# EAGLE board OpenLog_Panel_v14 (EAGLE 7.3.0), part 1 of 7
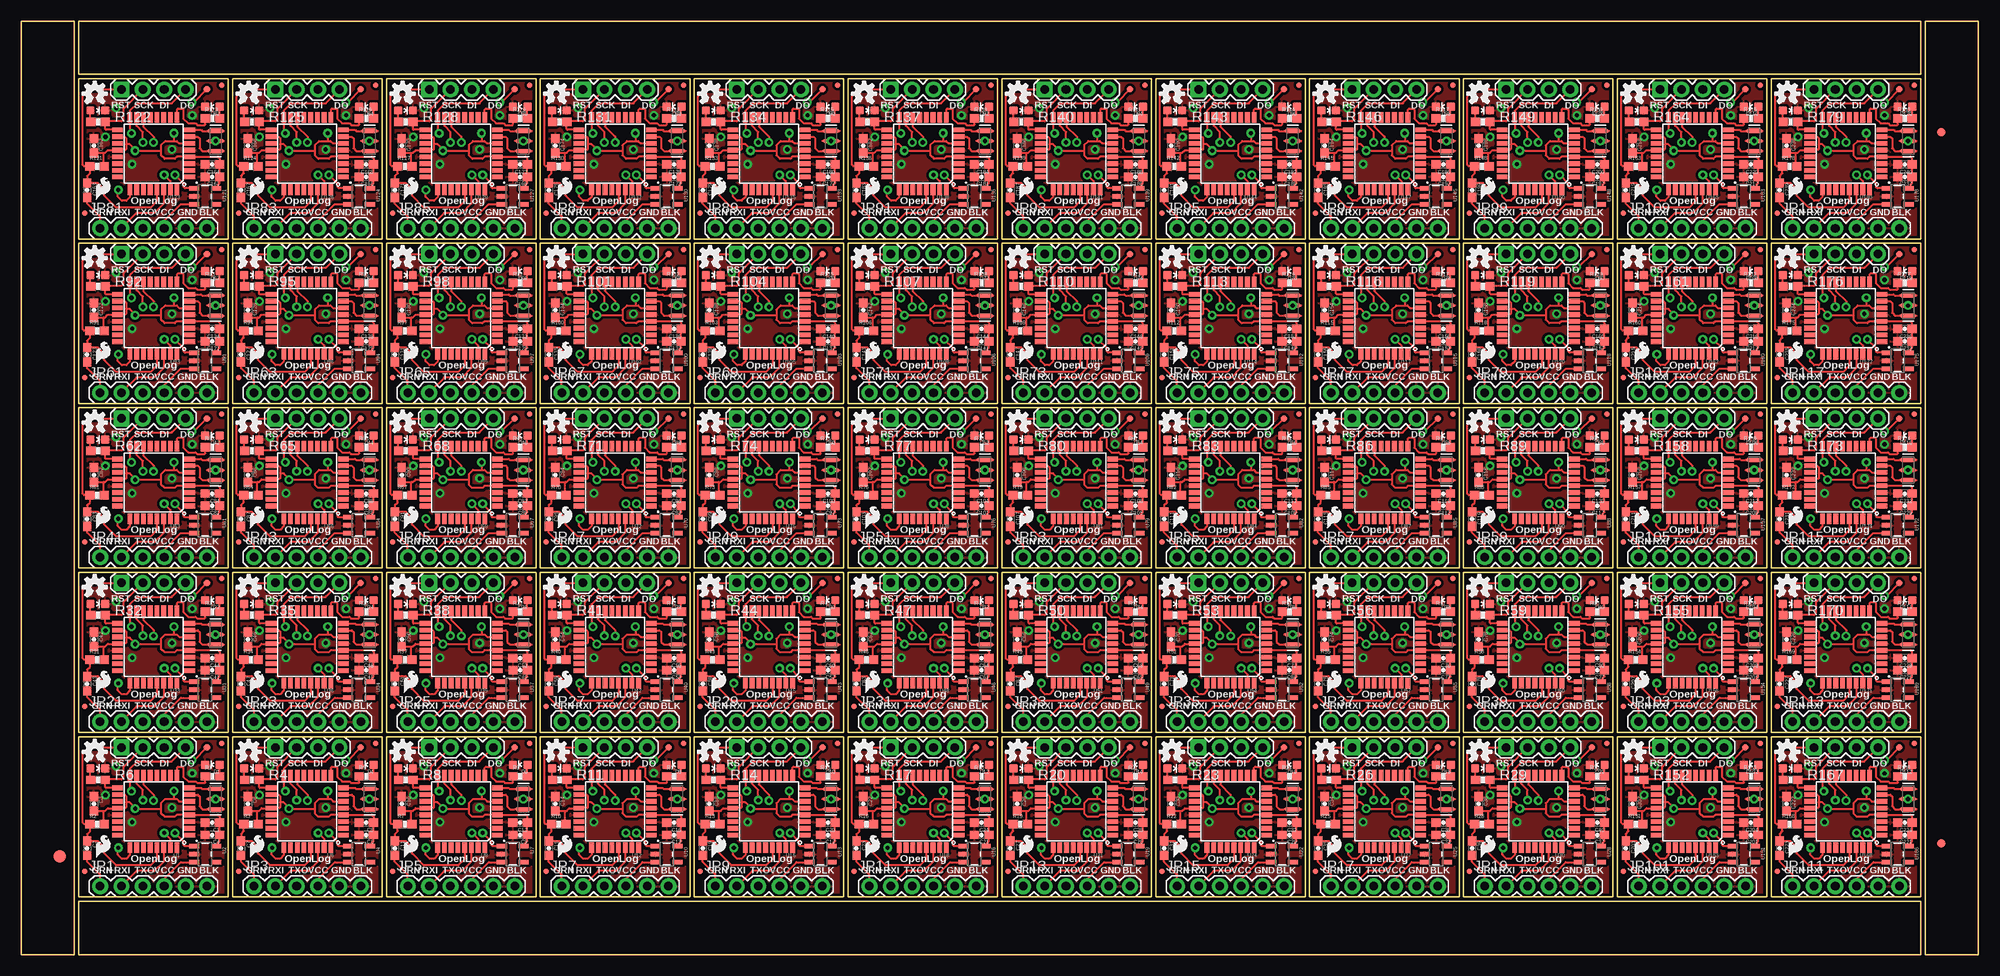
[diagram p0: board, top side]
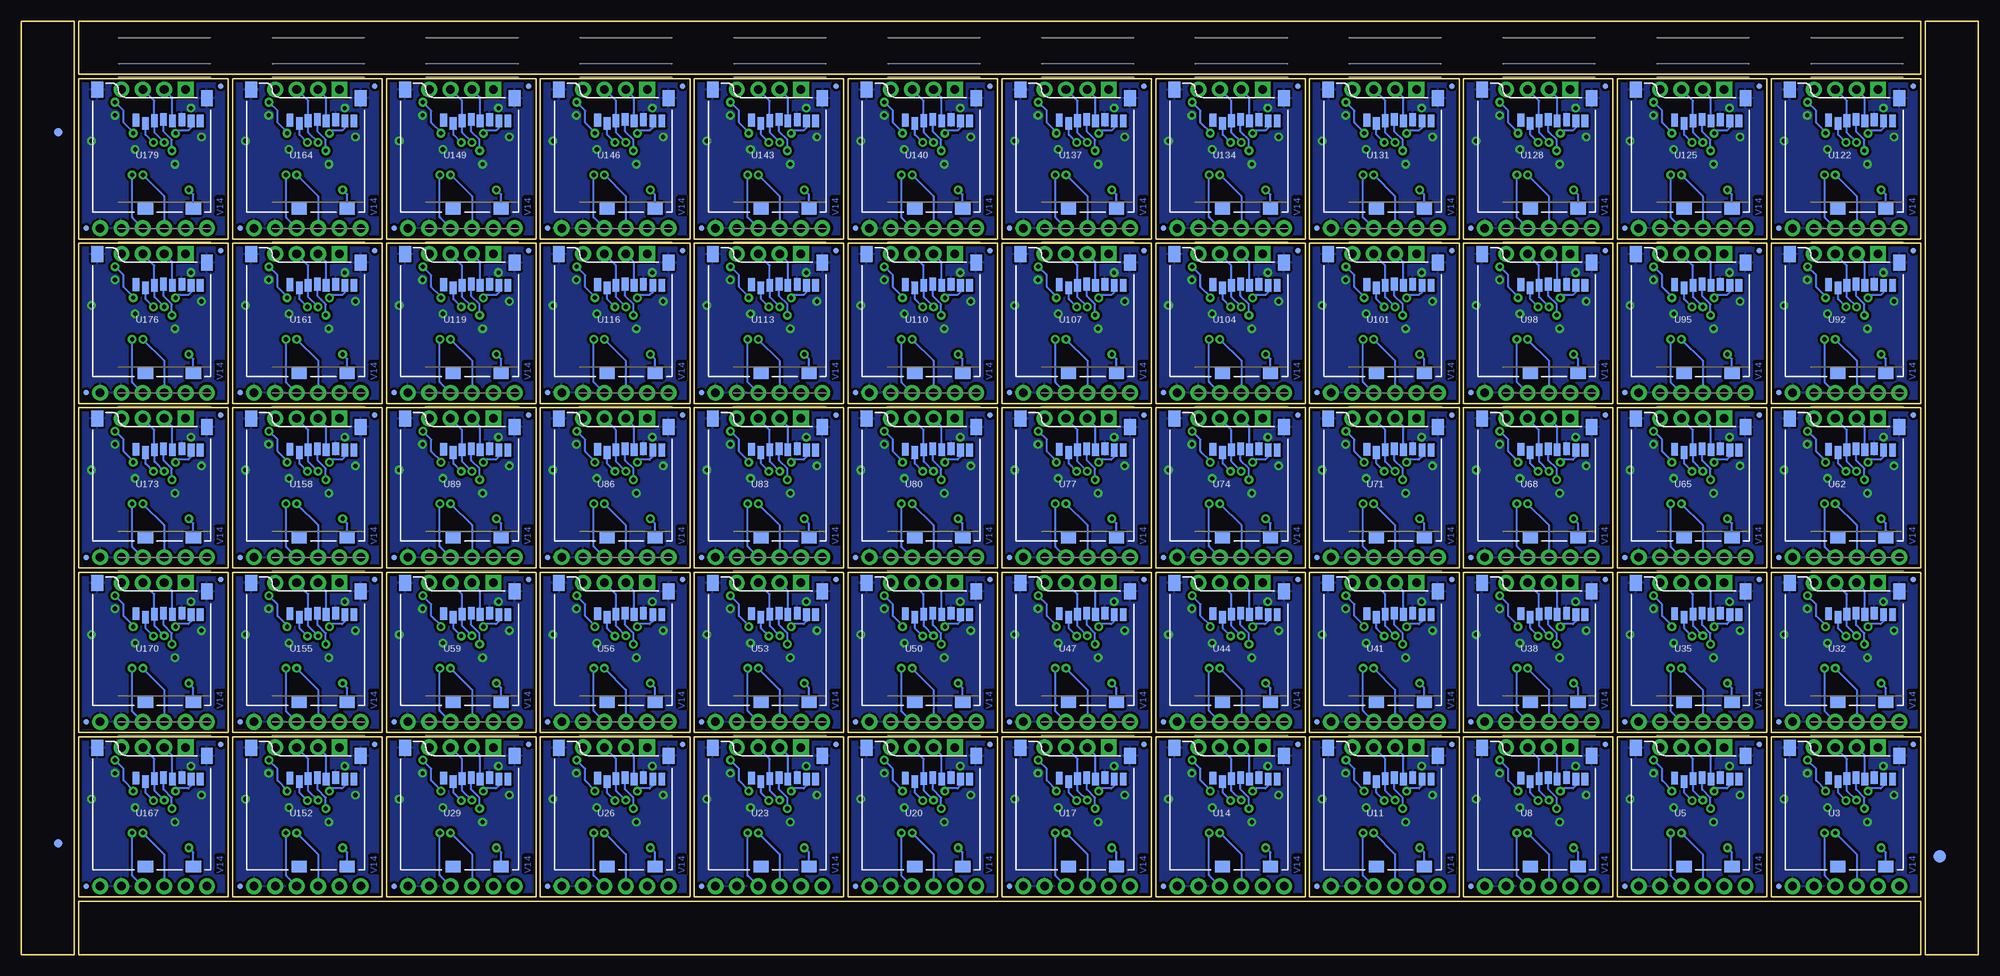
[diagram p1: board, bottom side, seen from below]

Size 232.66 x 111 mm. Coordinates in mm from the lower left corner, seen from the top.
Outline: 256 segments
Copper layers (1*16): Top 0.035mm / dielectric 1.5mm / Bottom 0.035mm
Design rules "SparkFun-2-layer": minimum track width 7mil, minimum drill 15mil, track to track 8mil, track to pad 8mil, pad to pad 8mil, via to via 8mil, smd to smd 8mil, copper to edge 8mil, drill to drill 8mil, minimum pad ring 12mil, minimum via ring 10mil, stop-mask expansion 4mil, vias tented up to drill 20mil, thermal gap 10mil
Net classes: 0 default: width 0.178 mm; 1 vcc: width 0.203 mm

## Footprints (pad centres in the part's own frame; a part is rotated, then mirrored left to right if it is on the bottom)
0603-CAP = smd 1.1 x 1: 1 -0.85,0; 2 0.85,0
LED-0603 = smd 1 x 1: A 0,-0.877; C 0,0.877
FIDUCIAL-1.5X3 = smd 1.5 x 1.5: 1 0,0
FIDUCIAL-1X2 = smd 1 x 1: 1 0,0
MICRO-FIDUCIAL = smd 0.635 x 0.635: 1 0,0
1X06 = drill 1.016 pad 1.88: 1 0,0; 2 2.54,0; 3 5.08,0; 4 7.62,0; 5 10.16,0; 6 12.7,0
1X04 = drill 1.016 pad 1.88 square: 1 0,0 | drill 1.016 pad 1.88: 2 2.54,0; 3 5.08,0; 4 7.62,0
RESONATOR-SMD = smd 0.45 x 1.905: 1 -1.2,0; 2 0,0; 3 1.2,0
0603-RES = smd 1.1 x 1: 1 -0.85,0; 2 0.85,0
PAD.03X.03 = smd 0.762 x 0.762: P$1 0,0
TQFP32-08 = smd 1.27 x 0.559: 1 -4.293,2.8; 2 -4.293,2; 3 -4.293,1.2; 4 -4.293,0.4; 5 -4.293,-0.4; 6 -4.293,-1.2; 7 -4.293,-2; 8 -4.293,-2.8; 17 4.293,-2.8; 18 4.293,-2; 19 4.293,-1.2; 20 4.293,-0.4; 21 4.293,0.4; 22 4.293,1.2; 23 4.293,2; 24 4.293,2.8 | smd 0.559 x 1.27: 9 -2.8,-4.293; 10 -2,-4.293; 11 -1.2,-4.293; 12 -0.4,-4.293; 13 0.4,-4.293; 14 1.2,-4.293; 15 2,-4.293; 16 2.8,-4.293; 25 2.8,4.293; 26 2,4.293; 27 1.2,4.293; 28 0.4,4.293; 29 -0.4,4.293; 30 -1.2,4.293; 31 -2,4.293; 32 -2.8,4.293
SOT23-5 = smd 0.55 x 1.2: 1 -0.95,-1.3; 2 0,-1.3; 3 0.95,-1.3; 4 0.95,1.3; 5 -0.95,1.3
MICROSD_1:1 = smd 0.8 x 1.5: 1 5.096,10.919; 2 6.218,10.519; 3 7.274,10.853; 4 8.367,10.982; 5 9.421,10.828; 6 10.539,10.973; 7 11.648,10.819; 8 12.721,10.819 | smd 1.8 x 1.4: CD1 11.92,0.4; CD2 6.22,0.4 | smd 1.4 x 1.9: GND1 0.497,14.55; GND3 13.52,13.55

## Placement (x,y rotation side)
C1  1.0uF  [0603-CAP]  22.75,15.7 180 top
C2  0.1uF  [0603-CAP]  7.87,12.65 270 top
C3  0.1uF  [0603-CAP]  8.67,17.93 270 top
C4  0.1uF  [0603-CAP]  22.75,14.24 180 top
C5  0.1uF  [0603-CAP]  41.04,14.24 180 top
C6  0.1uF  [0603-CAP]  26.96,17.93 270 top
C7  0.1uF  [0603-CAP]  26.15,12.65 270 top
C8  1.0uF  [0603-CAP]  41.04,15.7 180 top
C9  0.1uF  [0603-CAP]  59.33,14.24 180 top
C10  0.1uF  [0603-CAP]  45.25,17.93 270 top
C11  0.1uF  [0603-CAP]  44.44,12.65 270 top
C12  1.0uF  [0603-CAP]  59.32,15.7 180 top
C13  0.1uF  [0603-CAP]  77.61,14.24 180 top
C14  0.1uF  [0603-CAP]  63.53,17.93 270 top
C15  0.1uF  [0603-CAP]  62.73,12.65 270 top
C16  1.0uF  [0603-CAP]  77.61,15.7 180 top
C17  0.1uF  [0603-CAP]  95.9,14.24 180 top
C18  0.1uF  [0603-CAP]  81.82,17.93 270 top
C19  0.1uF  [0603-CAP]  81.02,12.65 270 top
C20  1.0uF  [0603-CAP]  95.9,15.7 180 top
C21  0.1uF  [0603-CAP]  114.19,14.24 180 top
C22  0.1uF  [0603-CAP]  100.11,17.93 270 top
C23  0.1uF  [0603-CAP]  99.31,12.65 270 top
C24  1.0uF  [0603-CAP]  114.19,15.7 180 top
C25  0.1uF  [0603-CAP]  132.48,14.24 180 top
C26  0.1uF  [0603-CAP]  118.4,17.93 270 top
C27  0.1uF  [0603-CAP]  117.59,12.65 270 top
C28  1.0uF  [0603-CAP]  132.48,15.7 180 top
C29  0.1uF  [0603-CAP]  150.77,14.24 180 top
C30  0.1uF  [0603-CAP]  136.69,17.93 270 top
C31  0.1uF  [0603-CAP]  135.88,12.65 270 top
C32  1.0uF  [0603-CAP]  150.76,15.7 180 top
C33  0.1uF  [0603-CAP]  169.05,14.24 180 top
C34  0.1uF  [0603-CAP]  154.97,17.93 270 top
C35  0.1uF  [0603-CAP]  154.17,12.65 270 top
C36  1.0uF  [0603-CAP]  169.05,15.7 180 top
C37  0.1uF  [0603-CAP]  187.34,14.24 180 top
C38  0.1uF  [0603-CAP]  173.26,17.93 270 top
C39  0.1uF  [0603-CAP]  172.46,12.65 270 top
C40  1.0uF  [0603-CAP]  187.34,15.7 180 top
C41  0.1uF  [0603-CAP]  22.75,33.8 180 top
C42  0.1uF  [0603-CAP]  8.67,37.49 270 top
C43  0.1uF  [0603-CAP]  7.87,32.21 270 top
C44  1.0uF  [0603-CAP]  22.75,35.26 180 top
C45  0.1uF  [0603-CAP]  41.04,33.8 180 top
C46  0.1uF  [0603-CAP]  26.96,37.49 270 top
C47  0.1uF  [0603-CAP]  26.15,32.21 270 top
C48  1.0uF  [0603-CAP]  41.04,35.26 180 top
C49  0.1uF  [0603-CAP]  59.33,33.8 180 top
C50  0.1uF  [0603-CAP]  45.25,37.49 270 top
C51  0.1uF  [0603-CAP]  44.44,32.21 270 top
C52  1.0uF  [0603-CAP]  59.32,35.26 180 top
C53  0.1uF  [0603-CAP]  77.61,33.8 180 top
C54  0.1uF  [0603-CAP]  63.53,37.49 270 top
C55  0.1uF  [0603-CAP]  62.73,32.21 270 top
C56  1.0uF  [0603-CAP]  77.61,35.26 180 top
C57  0.1uF  [0603-CAP]  95.9,33.8 180 top
C58  0.1uF  [0603-CAP]  81.82,37.49 270 top
C59  0.1uF  [0603-CAP]  81.02,32.21 270 top
C60  1.0uF  [0603-CAP]  95.9,35.26 180 top
C61  0.1uF  [0603-CAP]  114.19,33.8 180 top
C62  0.1uF  [0603-CAP]  100.11,37.49 270 top
C63  0.1uF  [0603-CAP]  99.31,32.21 270 top
C64  1.0uF  [0603-CAP]  114.19,35.26 180 top
C65  0.1uF  [0603-CAP]  132.48,33.8 180 top
C66  0.1uF  [0603-CAP]  118.4,37.49 270 top
C67  0.1uF  [0603-CAP]  117.59,32.21 270 top
C68  1.0uF  [0603-CAP]  132.48,35.26 180 top
C69  0.1uF  [0603-CAP]  150.77,33.8 180 top
C70  0.1uF  [0603-CAP]  136.69,37.49 270 top
C71  0.1uF  [0603-CAP]  135.88,32.21 270 top
C72  1.0uF  [0603-CAP]  150.76,35.26 180 top
C73  0.1uF  [0603-CAP]  169.05,33.8 180 top
C74  0.1uF  [0603-CAP]  154.97,37.49 270 top
C75  0.1uF  [0603-CAP]  154.17,32.21 270 top
C76  1.0uF  [0603-CAP]  169.05,35.26 180 top
C77  0.1uF  [0603-CAP]  187.34,33.8 180 top
C78  0.1uF  [0603-CAP]  173.26,37.49 270 top
C79  0.1uF  [0603-CAP]  172.46,32.21 270 top
C80  1.0uF  [0603-CAP]  187.34,35.26 180 top
C81  0.1uF  [0603-CAP]  22.75,53.36 180 top
C82  0.1uF  [0603-CAP]  8.67,57.05 270 top
C83  0.1uF  [0603-CAP]  7.87,51.77 270 top
C84  1.0uF  [0603-CAP]  22.75,54.82 180 top
C85  0.1uF  [0603-CAP]  41.04,53.36 180 top
C86  0.1uF  [0603-CAP]  26.96,57.05 270 top
C87  0.1uF  [0603-CAP]  26.15,51.77 270 top
C88  1.0uF  [0603-CAP]  41.04,54.82 180 top
C89  0.1uF  [0603-CAP]  59.33,53.36 180 top
C90  0.1uF  [0603-CAP]  45.25,57.05 270 top
C91  0.1uF  [0603-CAP]  44.44,51.77 270 top
C92  1.0uF  [0603-CAP]  59.32,54.82 180 top
C93  0.1uF  [0603-CAP]  77.61,53.36 180 top
C94  0.1uF  [0603-CAP]  63.53,57.05 270 top
C95  0.1uF  [0603-CAP]  62.73,51.77 270 top
C96  1.0uF  [0603-CAP]  77.61,54.82 180 top
C97  0.1uF  [0603-CAP]  95.9,53.36 180 top
C98  0.1uF  [0603-CAP]  81.82,57.05 270 top
C99  0.1uF  [0603-CAP]  81.02,51.77 270 top
C100  1.0uF  [0603-CAP]  95.9,54.82 180 top
C101  0.1uF  [0603-CAP]  114.19,53.36 180 top
C102  0.1uF  [0603-CAP]  100.11,57.05 270 top
C103  0.1uF  [0603-CAP]  99.31,51.77 270 top
C104  1.0uF  [0603-CAP]  114.19,54.82 180 top
C105  0.1uF  [0603-CAP]  132.48,53.36 180 top
C106  0.1uF  [0603-CAP]  118.4,57.05 270 top
C107  0.1uF  [0603-CAP]  117.59,51.77 270 top
C108  1.0uF  [0603-CAP]  132.48,54.82 180 top
C109  0.1uF  [0603-CAP]  150.77,53.36 180 top
C110  0.1uF  [0603-CAP]  136.69,57.05 270 top
C111  0.1uF  [0603-CAP]  135.88,51.77 270 top
C112  1.0uF  [0603-CAP]  150.76,54.82 180 top
C113  0.1uF  [0603-CAP]  169.05,53.36 180 top
C114  0.1uF  [0603-CAP]  154.97,57.05 270 top
C115  0.1uF  [0603-CAP]  154.17,51.77 270 top
C116  1.0uF  [0603-CAP]  169.05,54.82 180 top
C117  0.1uF  [0603-CAP]  187.34,53.36 180 top
C118  0.1uF  [0603-CAP]  173.26,57.05 270 top
C119  0.1uF  [0603-CAP]  172.46,51.77 270 top
C120  1.0uF  [0603-CAP]  187.34,54.82 180 top
C121  0.1uF  [0603-CAP]  22.75,72.92 180 top
C122  0.1uF  [0603-CAP]  8.67,76.61 270 top
C123  0.1uF  [0603-CAP]  7.87,71.33 270 top
C124  1.0uF  [0603-CAP]  22.75,74.38 180 top
C125  0.1uF  [0603-CAP]  41.04,72.92 180 top
C126  0.1uF  [0603-CAP]  26.96,76.61 270 top
C127  0.1uF  [0603-CAP]  26.15,71.33 270 top
C128  1.0uF  [0603-CAP]  41.04,74.38 180 top
C129  0.1uF  [0603-CAP]  59.33,72.92 180 top
C130  0.1uF  [0603-CAP]  45.25,76.61 270 top
C131  0.1uF  [0603-CAP]  44.44,71.33 270 top
C132  1.0uF  [0603-CAP]  59.32,74.38 180 top
C133  0.1uF  [0603-CAP]  77.61,72.92 180 top
C134  0.1uF  [0603-CAP]  63.53,76.61 270 top
C135  0.1uF  [0603-CAP]  62.73,71.33 270 top
C136  1.0uF  [0603-CAP]  77.61,74.38 180 top
C137  0.1uF  [0603-CAP]  95.9,72.92 180 top
C138  0.1uF  [0603-CAP]  81.82,76.61 270 top
C139  0.1uF  [0603-CAP]  81.02,71.33 270 top
C140  1.0uF  [0603-CAP]  95.9,74.38 180 top
C141  0.1uF  [0603-CAP]  114.19,72.92 180 top
C142  0.1uF  [0603-CAP]  100.11,76.61 270 top
C143  0.1uF  [0603-CAP]  99.31,71.33 270 top
C144  1.0uF  [0603-CAP]  114.19,74.38 180 top
C145  0.1uF  [0603-CAP]  132.48,72.92 180 top
C146  0.1uF  [0603-CAP]  118.4,76.61 270 top
C147  0.1uF  [0603-CAP]  117.59,71.33 270 top
C148  1.0uF  [0603-CAP]  132.48,74.38 180 top
C149  0.1uF  [0603-CAP]  150.77,72.92 180 top
C150  0.1uF  [0603-CAP]  136.69,76.61 270 top
C151  0.1uF  [0603-CAP]  135.88,71.33 270 top
C152  1.0uF  [0603-CAP]  150.76,74.38 180 top
C153  0.1uF  [0603-CAP]  169.05,72.92 180 top
C154  0.1uF  [0603-CAP]  154.97,76.61 270 top
C155  0.1uF  [0603-CAP]  154.17,71.33 270 top
C156  1.0uF  [0603-CAP]  169.05,74.38 180 top
C157  0.1uF  [0603-CAP]  187.34,72.92 180 top
C158  0.1uF  [0603-CAP]  173.26,76.61 270 top
C159  0.1uF  [0603-CAP]  172.46,71.33 270 top
C160  1.0uF  [0603-CAP]  187.34,74.38 180 top
C161  0.1uF  [0603-CAP]  22.75,92.47 180 top
C162  0.1uF  [0603-CAP]  8.67,96.17 270 top
C163  0.1uF  [0603-CAP]  7.87,90.88 270 top
C164  1.0uF  [0603-CAP]  22.75,93.94 180 top
C165  0.1uF  [0603-CAP]  41.04,92.47 180 top
C166  0.1uF  [0603-CAP]  26.96,96.17 270 top
C167  0.1uF  [0603-CAP]  26.15,90.88 270 top
C168  1.0uF  [0603-CAP]  41.04,93.94 180 top
C169  0.1uF  [0603-CAP]  59.33,92.47 180 top
C170  0.1uF  [0603-CAP]  45.25,96.17 270 top
C171  0.1uF  [0603-CAP]  44.44,90.88 270 top
C172  1.0uF  [0603-CAP]  59.32,93.94 180 top
C173  0.1uF  [0603-CAP]  77.61,92.47 180 top
C174  0.1uF  [0603-CAP]  63.53,96.17 270 top
C175  0.1uF  [0603-CAP]  62.73,90.88 270 top
C176  1.0uF  [0603-CAP]  77.61,93.94 180 top
C177  0.1uF  [0603-CAP]  95.9,92.47 180 top
C178  0.1uF  [0603-CAP]  81.82,96.17 270 top
C179  0.1uF  [0603-CAP]  81.02,90.88 270 top
C180  1.0uF  [0603-CAP]  95.9,93.94 180 top
C181  0.1uF  [0603-CAP]  114.19,92.47 180 top
C182  0.1uF  [0603-CAP]  100.11,96.17 270 top
C183  0.1uF  [0603-CAP]  99.31,90.88 270 top
C184  1.0uF  [0603-CAP]  114.19,93.94 180 top
C185  0.1uF  [0603-CAP]  132.48,92.47 180 top
C186  0.1uF  [0603-CAP]  118.4,96.17 270 top
C187  0.1uF  [0603-CAP]  117.59,90.88 270 top
C188  1.0uF  [0603-CAP]  132.48,93.94 180 top
C189  0.1uF  [0603-CAP]  150.77,92.47 180 top
C190  0.1uF  [0603-CAP]  136.69,96.17 270 top
C191  0.1uF  [0603-CAP]  135.88,90.88 270 top
C192  1.0uF  [0603-CAP]  150.76,93.94 180 top
C193  0.1uF  [0603-CAP]  169.05,92.47 180 top
C194  0.1uF  [0603-CAP]  154.97,96.17 270 top
C195  0.1uF  [0603-CAP]  154.17,90.88 270 top
C196  1.0uF  [0603-CAP]  169.05,93.94 180 top
C197  0.1uF  [0603-CAP]  187.34,92.47 180 top
C198  0.1uF  [0603-CAP]  173.26,96.17 270 top
C199  0.1uF  [0603-CAP]  172.46,90.88 270 top
C200  1.0uF  [0603-CAP]  187.34,93.94 180 top
C201  0.1uF  [0603-CAP]  205.63,14.24 180 top
C202  0.1uF  [0603-CAP]  191.55,17.93 270 top
C203  0.1uF  [0603-CAP]  190.75,12.65 270 top
C204  1.0uF  [0603-CAP]  205.63,15.7 180 top
C205  0.1uF  [0603-CAP]  205.63,33.8 180 top
C206  0.1uF  [0603-CAP]  191.55,37.49 270 top
C207  0.1uF  [0603-CAP]  190.75,32.21 270 top
C208  1.0uF  [0603-CAP]  205.63,35.26 180 top
C209  0.1uF  [0603-CAP]  205.63,53.36 180 top
C210  0.1uF  [0603-CAP]  191.55,57.05 270 top
C211  0.1uF  [0603-CAP]  190.75,51.77 270 top
C212  1.0uF  [0603-CAP]  205.63,54.82 180 top
C213  0.1uF  [0603-CAP]  205.63,72.92 180 top
C214  0.1uF  [0603-CAP]  191.55,76.61 270 top
C215  0.1uF  [0603-CAP]  190.75,71.33 270 top
C216  1.0uF  [0603-CAP]  205.63,74.38 180 top
C217  0.1uF  [0603-CAP]  205.63,92.47 180 top
C218  0.1uF  [0603-CAP]  191.55,96.17 270 top
C219  0.1uF  [0603-CAP]  190.75,90.88 270 top
C220  1.0uF  [0603-CAP]  205.63,93.94 180 top
C221  0.1uF  [0603-CAP]  223.92,14.24 180 top
C222  0.1uF  [0603-CAP]  209.84,17.93 270 top
C223  0.1uF  [0603-CAP]  209.03,12.65 270 top
C224  1.0uF  [0603-CAP]  223.92,15.7 180 top
C225  0.1uF  [0603-CAP]  223.92,33.8 180 top
C226  0.1uF  [0603-CAP]  209.84,37.49 270 top
C227  0.1uF  [0603-CAP]  209.03,32.21 270 top
C228  1.0uF  [0603-CAP]  223.92,35.26 180 top
C229  0.1uF  [0603-CAP]  223.92,53.36 180 top
C230  0.1uF  [0603-CAP]  209.84,57.05 270 top
C231  0.1uF  [0603-CAP]  209.03,51.77 270 top
C232  1.0uF  [0603-CAP]  223.92,54.82 180 top
C233  0.1uF  [0603-CAP]  223.92,72.92 180 top
C234  0.1uF  [0603-CAP]  209.84,76.61 270 top
C235  0.1uF  [0603-CAP]  209.03,71.33 270 top
C236  1.0uF  [0603-CAP]  223.92,74.38 180 top
C237  0.1uF  [0603-CAP]  223.92,92.47 180 top
C238  0.1uF  [0603-CAP]  209.84,96.17 270 top
C239  0.1uF  [0603-CAP]  209.03,90.88 270 top
C240  1.0uF  [0603-CAP]  223.92,93.94 180 top
D1  BLUE  [LED-0603]  22.76,22.58 90 top
D2  GREEN  [LED-0603]  27.41,22.14 270 top
D3  GREEN  [LED-0603]  9.13,22.14 270 top
D4  BLUE  [LED-0603]  41.05,22.58 90 top
D5  GREEN  [LED-0603]  45.7,22.14 270 top
D6  BLUE  [LED-0603]  59.33,22.58 90 top
D7  GREEN  [LED-0603]  63.99,22.14 270 top
D8  BLUE  [LED-0603]  77.62,22.58 90 top
D9  GREEN  [LED-0603]  82.28,22.14 270 top
D10  BLUE  [LED-0603]  95.91,22.58 90 top
D11  GREEN  [LED-0603]  100.57,22.14 270 top
D12  BLUE  [LED-0603]  114.2,22.58 90 top
D13  GREEN  [LED-0603]  118.85,22.14 270 top
D14  BLUE  [LED-0603]  132.49,22.58 90 top
D15  GREEN  [LED-0603]  137.14,22.14 270 top
D16  BLUE  [LED-0603]  150.77,22.58 90 top
D17  GREEN  [LED-0603]  155.43,22.14 270 top
D18  BLUE  [LED-0603]  169.06,22.58 90 top
D19  GREEN  [LED-0603]  173.72,22.14 270 top
D20  BLUE  [LED-0603]  187.35,22.58 90 top
D21  GREEN  [LED-0603]  9.13,41.7 270 top
D22  BLUE  [LED-0603]  22.76,42.14 90 top
D23  GREEN  [LED-0603]  27.41,41.7 270 top
D24  BLUE  [LED-0603]  41.05,42.14 90 top
D25  GREEN  [LED-0603]  45.7,41.7 270 top
D26  BLUE  [LED-0603]  59.33,42.14 90 top
D27  GREEN  [LED-0603]  63.99,41.7 270 top
D28  BLUE  [LED-0603]  77.62,42.14 90 top
D29  GREEN  [LED-0603]  82.28,41.7 270 top
D30  BLUE  [LED-0603]  95.91,42.14 90 top
D31  GREEN  [LED-0603]  100.57,41.7 270 top
D32  BLUE  [LED-0603]  114.2,42.14 90 top
D33  GREEN  [LED-0603]  118.85,41.7 270 top
D34  BLUE  [LED-0603]  132.49,42.14 90 top
D35  GREEN  [LED-0603]  137.14,41.7 270 top
D36  BLUE  [LED-0603]  150.77,42.14 90 top
D37  GREEN  [LED-0603]  155.43,41.7 270 top
D38  BLUE  [LED-0603]  169.06,42.14 90 top
D39  GREEN  [LED-0603]  173.72,41.7 270 top
D40  BLUE  [LED-0603]  187.35,42.14 90 top
D41  GREEN  [LED-0603]  9.13,61.25 270 top
D42  BLUE  [LED-0603]  22.76,61.7 90 top
D43  GREEN  [LED-0603]  27.41,61.25 270 top
D44  BLUE  [LED-0603]  41.05,61.7 90 top
D45  GREEN  [LED-0603]  45.7,61.25 270 top
D46  BLUE  [LED-0603]  59.33,61.7 90 top
D47  GREEN  [LED-0603]  63.99,61.25 270 top
D48  BLUE  [LED-0603]  77.62,61.7 90 top
D49  GREEN  [LED-0603]  82.28,61.25 270 top
D50  BLUE  [LED-0603]  95.91,61.7 90 top
D51  GREEN  [LED-0603]  100.57,61.25 270 top
D52  BLUE  [LED-0603]  114.2,61.7 90 top
D53  GREEN  [LED-0603]  118.85,61.25 270 top
D54  BLUE  [LED-0603]  132.49,61.7 90 top
D55  GREEN  [LED-0603]  137.14,61.25 270 top
D56  BLUE  [LED-0603]  150.77,61.7 90 top
D57  GREEN  [LED-0603]  155.43,61.25 270 top
D58  BLUE  [LED-0603]  169.06,61.7 90 top
D59  GREEN  [LED-0603]  173.72,61.25 270 top
D60  BLUE  [LED-0603]  187.35,61.7 90 top
D61  GREEN  [LED-0603]  9.13,80.81 270 top
D62  BLUE  [LED-0603]  22.76,81.25 90 top
D63  GREEN  [LED-0603]  27.41,80.81 270 top
D64  BLUE  [LED-0603]  41.05,81.25 90 top
D65  GREEN  [LED-0603]  45.7,80.81 270 top
D66  BLUE  [LED-0603]  59.33,81.25 90 top
D67  GREEN  [LED-0603]  63.99,80.81 270 top
D68  BLUE  [LED-0603]  77.62,81.25 90 top
D69  GREEN  [LED-0603]  82.28,80.81 270 top
D70  BLUE  [LED-0603]  95.91,81.25 90 top
D71  GREEN  [LED-0603]  100.57,80.81 270 top
D72  BLUE  [LED-0603]  114.2,81.25 90 top
D73  GREEN  [LED-0603]  118.85,80.81 270 top
D74  BLUE  [LED-0603]  132.49,81.25 90 top
D75  GREEN  [LED-0603]  137.14,80.81 270 top
D76  BLUE  [LED-0603]  150.77,81.25 90 top
D77  GREEN  [LED-0603]  155.43,80.81 270 top
D78  BLUE  [LED-0603]  169.06,81.25 90 top
D79  GREEN  [LED-0603]  173.72,80.81 270 top
D80  BLUE  [LED-0603]  187.35,81.25 90 top
D81  GREEN  [LED-0603]  9.13,100.37 270 top
D82  BLUE  [LED-0603]  22.76,100.81 90 top
D83  GREEN  [LED-0603]  27.41,100.37 270 top
D84  BLUE  [LED-0603]  41.05,100.81 90 top
D85  GREEN  [LED-0603]  45.7,100.37 270 top
D86  BLUE  [LED-0603]  59.33,100.81 90 top
D87  GREEN  [LED-0603]  63.99,100.37 270 top
D88  BLUE  [LED-0603]  77.62,100.81 90 top
D89  GREEN  [LED-0603]  82.28,100.37 270 top
D90  BLUE  [LED-0603]  95.91,100.81 90 top
D91  GREEN  [LED-0603]  100.57,100.37 270 top
D92  BLUE  [LED-0603]  114.2,100.81 90 top
D93  GREEN  [LED-0603]  118.85,100.37 270 top
D94  BLUE  [LED-0603]  132.49,100.81 90 top
D95  GREEN  [LED-0603]  137.14,100.37 270 top
D96  BLUE  [LED-0603]  150.77,100.81 90 top
D97  GREEN  [LED-0603]  155.43,100.37 270 top
D98  BLUE  [LED-0603]  169.06,100.81 90 top
D99  GREEN  [LED-0603]  173.72,100.37 270 top
D100  BLUE  [LED-0603]  187.35,100.81 90 top
D101  GREEN  [LED-0603]  192.01,22.14 270 top
D102  BLUE  [LED-0603]  205.64,22.58 90 top
D103  GREEN  [LED-0603]  192.01,41.7 270 top
D104  BLUE  [LED-0603]  205.64,42.14 90 top
D105  GREEN  [LED-0603]  192.01,61.25 270 top
D106  BLUE  [LED-0603]  205.64,61.7 90 top
D107  GREEN  [LED-0603]  192.01,80.81 270 top
D108  BLUE  [LED-0603]  205.64,81.25 90 top
D109  GREEN  [LED-0603]  192.01,100.37 270 top
D110  BLUE  [LED-0603]  205.64,100.81 90 top
D111  GREEN  [LED-0603]  210.29,22.14 270 top
D112  BLUE  [LED-0603]  223.93,22.58 90 top
D113  GREEN  [LED-0603]  210.29,41.7 270 top
D114  BLUE  [LED-0603]  223.93,42.14 90 top
D115  GREEN  [LED-0603]  210.29,61.25 270 top
D116  BLUE  [LED-0603]  223.93,61.7 90 top
D117  GREEN  [LED-0603]  210.29,80.81 270 top
D118  BLUE  [LED-0603]  223.93,81.25 90 top
D119  GREEN  [LED-0603]  210.29,100.37 270 top
D120  BLUE  [LED-0603]  223.93,100.81 90 top
E$1  [FIDUCIAL-1.5X3]  4.57,11.68 0 top
E$2  [FIDUCIAL-1.5X3]  4.57,11.68 0 bottom
E$3  [FIDUCIAL-1X2]  228.22,13.21 0 bottom
E$4  [FIDUCIAL-1X2]  228.22,97.79 180 bottom
E$6  [FIDUCIAL-1X2]  228.22,97.79 180 top
E$7  [FIDUCIAL-1X2]  228.22,13.21 0 top
FID1  FIDUCIALUFIDUCIAL  [MICRO-FIDUCIAL]  23.88,25.15 0 top
FID2  FIDUCIALUFIDUCIAL  [MICRO-FIDUCIAL]  7.58,9.93 0 top
FID3  FIDUCIALUFIDUCIAL  [MICRO-FIDUCIAL]  23.75,8.13 0 bottom
FID4  FIDUCIALUFIDUCIAL  [MICRO-FIDUCIAL]  7.75,25.02 0 bottom
FID5  FIDUCIALUFIDUCIAL  [MICRO-FIDUCIAL]  42.16,25.15 0 top
FID6  FIDUCIALUFIDUCIAL  [MICRO-FIDUCIAL]  25.86,9.93 0 top
FID7  FIDUCIALUFIDUCIAL  [MICRO-FIDUCIAL]  42.04,8.13 0 bottom
FID8  FIDUCIALUFIDUCIAL  [MICRO-FIDUCIAL]  26.04,25.02 0 bottom
FID9  FIDUCIALUFIDUCIAL  [MICRO-FIDUCIAL]  60.45,25.15 0 top
FID10  FIDUCIALUFIDUCIAL  [MICRO-FIDUCIAL]  44.15,9.93 0 top
FID11  FIDUCIALUFIDUCIAL  [MICRO-FIDUCIAL]  60.33,8.13 0 bottom
FID12  FIDUCIALUFIDUCIAL  [MICRO-FIDUCIAL]  44.32,25.02 0 bottom
FID13  FIDUCIALUFIDUCIAL  [MICRO-FIDUCIAL]  78.74,25.15 0 top
FID14  FIDUCIALUFIDUCIAL  [MICRO-FIDUCIAL]  62.44,9.93 0 top
FID15  FIDUCIALUFIDUCIAL  [MICRO-FIDUCIAL]  78.61,8.13 0 bottom
FID16  FIDUCIALUFIDUCIAL  [MICRO-FIDUCIAL]  62.61,25.02 0 bottom
FID17  FIDUCIALUFIDUCIAL  [MICRO-FIDUCIAL]  97.03,25.15 0 top
FID18  FIDUCIALUFIDUCIAL  [MICRO-FIDUCIAL]  80.73,9.93 0 top
FID19  FIDUCIALUFIDUCIAL  [MICRO-FIDUCIAL]  96.9,8.13 0 bottom
FID20  FIDUCIALUFIDUCIAL  [MICRO-FIDUCIAL]  80.9,25.02 0 bottom
FID21  FIDUCIALUFIDUCIAL  [MICRO-FIDUCIAL]  115.32,25.15 0 top
FID22  FIDUCIALUFIDUCIAL  [MICRO-FIDUCIAL]  99.02,9.93 0 top
FID23  FIDUCIALUFIDUCIAL  [MICRO-FIDUCIAL]  115.19,8.13 0 bottom
FID24  FIDUCIALUFIDUCIAL  [MICRO-FIDUCIAL]  99.19,25.02 0 bottom
FID25  FIDUCIALUFIDUCIAL  [MICRO-FIDUCIAL]  133.6,25.15 0 top
FID26  FIDUCIALUFIDUCIAL  [MICRO-FIDUCIAL]  117.3,9.93 0 top
FID27  FIDUCIALUFIDUCIAL  [MICRO-FIDUCIAL]  133.48,8.13 0 bottom
FID28  FIDUCIALUFIDUCIAL  [MICRO-FIDUCIAL]  117.47,25.02 0 bottom
FID29  FIDUCIALUFIDUCIAL  [MICRO-FIDUCIAL]  151.89,25.15 0 top
FID30  FIDUCIALUFIDUCIAL  [MICRO-FIDUCIAL]  135.59,9.93 0 top
FID31  FIDUCIALUFIDUCIAL  [MICRO-FIDUCIAL]  151.76,8.13 0 bottom
FID32  FIDUCIALUFIDUCIAL  [MICRO-FIDUCIAL]  135.76,25.02 0 bottom
FID33  FIDUCIALUFIDUCIAL  [MICRO-FIDUCIAL]  170.18,25.15 0 top
FID34  FIDUCIALUFIDUCIAL  [MICRO-FIDUCIAL]  153.88,9.93 0 top
FID35  FIDUCIALUFIDUCIAL  [MICRO-FIDUCIAL]  170.05,8.13 0 bottom
FID36  FIDUCIALUFIDUCIAL  [MICRO-FIDUCIAL]  154.05,25.02 0 bottom
FID37  FIDUCIALUFIDUCIAL  [MICRO-FIDUCIAL]  188.47,25.15 0 top
FID38  FIDUCIALUFIDUCIAL  [MICRO-FIDUCIAL]  172.17,9.93 0 top
FID39  FIDUCIALUFIDUCIAL  [MICRO-FIDUCIAL]  188.34,8.13 0 bottom
FID40  FIDUCIALUFIDUCIAL  [MICRO-FIDUCIAL]  172.34,25.02 0 bottom
FID41  FIDUCIALUFIDUCIAL  [MICRO-FIDUCIAL]  23.88,44.7 0 top
FID42  FIDUCIALUFIDUCIAL  [MICRO-FIDUCIAL]  7.58,29.49 0 top
FID43  FIDUCIALUFIDUCIAL  [MICRO-FIDUCIAL]  23.75,27.69 0 bottom
FID44  FIDUCIALUFIDUCIAL  [MICRO-FIDUCIAL]  7.75,44.58 0 bottom
FID45  FIDUCIALUFIDUCIAL  [MICRO-FIDUCIAL]  42.16,44.7 0 top
FID46  FIDUCIALUFIDUCIAL  [MICRO-FIDUCIAL]  25.86,29.49 0 top
FID47  FIDUCIALUFIDUCIAL  [MICRO-FIDUCIAL]  42.04,27.69 0 bottom
FID48  FIDUCIALUFIDUCIAL  [MICRO-FIDUCIAL]  26.04,44.58 0 bottom
FID49  FIDUCIALUFIDUCIAL  [MICRO-FIDUCIAL]  60.45,44.7 0 top
FID50  FIDUCIALUFIDUCIAL  [MICRO-FIDUCIAL]  44.15,29.49 0 top
FID51  FIDUCIALUFIDUCIAL  [MICRO-FIDUCIAL]  60.33,27.69 0 bottom
FID52  FIDUCIALUFIDUCIAL  [MICRO-FIDUCIAL]  44.32,44.58 0 bottom
FID53  FIDUCIALUFIDUCIAL  [MICRO-FIDUCIAL]  78.74,44.7 0 top
FID54  FIDUCIALUFIDUCIAL  [MICRO-FIDUCIAL]  62.44,29.49 0 top
FID55  FIDUCIALUFIDUCIAL  [MICRO-FIDUCIAL]  78.61,27.69 0 bottom
FID56  FIDUCIALUFIDUCIAL  [MICRO-FIDUCIAL]  62.61,44.58 0 bottom
FID57  FIDUCIALUFIDUCIAL  [MICRO-FIDUCIAL]  97.03,44.7 0 top
FID58  FIDUCIALUFIDUCIAL  [MICRO-FIDUCIAL]  80.73,29.49 0 top
FID59  FIDUCIALUFIDUCIAL  [MICRO-FIDUCIAL]  96.9,27.69 0 bottom
FID60  FIDUCIALUFIDUCIAL  [MICRO-FIDUCIAL]  80.9,44.58 0 bottom
FID61  FIDUCIALUFIDUCIAL  [MICRO-FIDUCIAL]  115.32,44.7 0 top
FID62  FIDUCIALUFIDUCIAL  [MICRO-FIDUCIAL]  99.02,29.49 0 top
FID63  FIDUCIALUFIDUCIAL  [MICRO-FIDUCIAL]  115.19,27.69 0 bottom
FID64  FIDUCIALUFIDUCIAL  [MICRO-FIDUCIAL]  99.19,44.58 0 bottom
FID65  FIDUCIALUFIDUCIAL  [MICRO-FIDUCIAL]  133.6,44.7 0 top
FID66  FIDUCIALUFIDUCIAL  [MICRO-FIDUCIAL]  117.3,29.49 0 top
FID67  FIDUCIALUFIDUCIAL  [MICRO-FIDUCIAL]  133.48,27.69 0 bottom
FID68  FIDUCIALUFIDUCIAL  [MICRO-FIDUCIAL]  117.47,44.58 0 bottom
FID69  FIDUCIALUFIDUCIAL  [MICRO-FIDUCIAL]  151.89,44.7 0 top
FID70  FIDUCIALUFIDUCIAL  [MICRO-FIDUCIAL]  135.59,29.49 0 top
FID71  FIDUCIALUFIDUCIAL  [MICRO-FIDUCIAL]  151.76,27.69 0 bottom
FID72  FIDUCIALUFIDUCIAL  [MICRO-FIDUCIAL]  135.76,44.58 0 bottom
FID73  FIDUCIALUFIDUCIAL  [MICRO-FIDUCIAL]  170.18,44.7 0 top
FID74  FIDUCIALUFIDUCIAL  [MICRO-FIDUCIAL]  153.88,29.49 0 top
FID75  FIDUCIALUFIDUCIAL  [MICRO-FIDUCIAL]  170.05,27.69 0 bottom
FID76  FIDUCIALUFIDUCIAL  [MICRO-FIDUCIAL]  154.05,44.58 0 bottom
FID77  FIDUCIALUFIDUCIAL  [MICRO-FIDUCIAL]  188.47,44.7 0 top
FID78  FIDUCIALUFIDUCIAL  [MICRO-FIDUCIAL]  172.17,29.49 0 top
FID79  FIDUCIALUFIDUCIAL  [MICRO-FIDUCIAL]  188.34,27.69 0 bottom
FID80  FIDUCIALUFIDUCIAL  [MICRO-FIDUCIAL]  172.34,44.58 0 bottom
FID81  FIDUCIALUFIDUCIAL  [MICRO-FIDUCIAL]  23.88,64.26 0 top
FID82  FIDUCIALUFIDUCIAL  [MICRO-FIDUCIAL]  7.58,49.04 0 top
FID83  FIDUCIALUFIDUCIAL  [MICRO-FIDUCIAL]  23.75,47.24 0 bottom
FID84  FIDUCIALUFIDUCIAL  [MICRO-FIDUCIAL]  7.75,64.14 0 bottom
FID85  FIDUCIALUFIDUCIAL  [MICRO-FIDUCIAL]  42.16,64.26 0 top
FID86  FIDUCIALUFIDUCIAL  [MICRO-FIDUCIAL]  25.86,49.04 0 top
FID87  FIDUCIALUFIDUCIAL  [MICRO-FIDUCIAL]  42.04,47.24 0 bottom
FID88  FIDUCIALUFIDUCIAL  [MICRO-FIDUCIAL]  26.04,64.14 0 bottom
FID89  FIDUCIALUFIDUCIAL  [MICRO-FIDUCIAL]  60.45,64.26 0 top
FID90  FIDUCIALUFIDUCIAL  [MICRO-FIDUCIAL]  44.15,49.04 0 top
FID91  FIDUCIALUFIDUCIAL  [MICRO-FIDUCIAL]  60.33,47.24 0 bottom
FID92  FIDUCIALUFIDUCIAL  [MICRO-FIDUCIAL]  44.32,64.14 0 bottom
FID93  FIDUCIALUFIDUCIAL  [MICRO-FIDUCIAL]  78.74,64.26 0 top
FID94  FIDUCIALUFIDUCIAL  [MICRO-FIDUCIAL]  62.44,49.04 0 top
FID95  FIDUCIALUFIDUCIAL  [MICRO-FIDUCIAL]  78.61,47.24 0 bottom
FID96  FIDUCIALUFIDUCIAL  [MICRO-FIDUCIAL]  62.61,64.14 0 bottom
FID97  FIDUCIALUFIDUCIAL  [MICRO-FIDUCIAL]  97.03,64.26 0 top
FID98  FIDUCIALUFIDUCIAL  [MICRO-FIDUCIAL]  80.73,49.04 0 top
FID99  FIDUCIALUFIDUCIAL  [MICRO-FIDUCIAL]  96.9,47.24 0 bottom
FID100  FIDUCIALUFIDUCIAL  [MICRO-FIDUCIAL]  80.9,64.14 0 bottom
FID101  FIDUCIALUFIDUCIAL  [MICRO-FIDUCIAL]  115.32,64.26 0 top
FID102  FIDUCIALUFIDUCIAL  [MICRO-FIDUCIAL]  99.02,49.04 0 top
FID103  FIDUCIALUFIDUCIAL  [MICRO-FIDUCIAL]  115.19,47.24 0 bottom
FID104  FIDUCIALUFIDUCIAL  [MICRO-FIDUCIAL]  99.19,64.14 0 bottom
FID105  FIDUCIALUFIDUCIAL  [MICRO-FIDUCIAL]  133.6,64.26 0 top
FID106  FIDUCIALUFIDUCIAL  [MICRO-FIDUCIAL]  117.3,49.04 0 top
FID107  FIDUCIALUFIDUCIAL  [MICRO-FIDUCIAL]  133.48,47.24 0 bottom
FID108  FIDUCIALUFIDUCIAL  [MICRO-FIDUCIAL]  117.47,64.14 0 bottom
FID109  FIDUCIALUFIDUCIAL  [MICRO-FIDUCIAL]  151.89,64.26 0 top
FID110  FIDUCIALUFIDUCIAL  [MICRO-FIDUCIAL]  135.59,49.04 0 top
FID111  FIDUCIALUFIDUCIAL  [MICRO-FIDUCIAL]  151.76,47.24 0 bottom
FID112  FIDUCIALUFIDUCIAL  [MICRO-FIDUCIAL]  135.76,64.14 0 bottom
FID113  FIDUCIALUFIDUCIAL  [MICRO-FIDUCIAL]  170.18,64.26 0 top
FID114  FIDUCIALUFIDUCIAL  [MICRO-FIDUCIAL]  153.88,49.04 0 top
FID115  FIDUCIALUFIDUCIAL  [MICRO-FIDUCIAL]  170.05,47.24 0 bottom
FID116  FIDUCIALUFIDUCIAL  [MICRO-FIDUCIAL]  154.05,64.14 0 bottom
FID117  FIDUCIALUFIDUCIAL  [MICRO-FIDUCIAL]  188.47,64.26 0 top
FID118  FIDUCIALUFIDUCIAL  [MICRO-FIDUCIAL]  172.17,49.04 0 top
FID119  FIDUCIALUFIDUCIAL  [MICRO-FIDUCIAL]  188.34,47.24 0 bottom
FID120  FIDUCIALUFIDUCIAL  [MICRO-FIDUCIAL]  172.34,64.14 0 bottom
FID121  FIDUCIALUFIDUCIAL  [MICRO-FIDUCIAL]  23.88,83.82 0 top
FID122  FIDUCIALUFIDUCIAL  [MICRO-FIDUCIAL]  7.58,68.6 0 top
FID123  FIDUCIALUFIDUCIAL  [MICRO-FIDUCIAL]  23.75,66.8 0 bottom
FID124  FIDUCIALUFIDUCIAL  [MICRO-FIDUCIAL]  7.75,83.69 0 bottom
FID125  FIDUCIALUFIDUCIAL  [MICRO-FIDUCIAL]  42.16,83.82 0 top
FID126  FIDUCIALUFIDUCIAL  [MICRO-FIDUCIAL]  25.86,68.6 0 top
FID127  FIDUCIALUFIDUCIAL  [MICRO-FIDUCIAL]  42.04,66.8 0 bottom
FID128  FIDUCIALUFIDUCIAL  [MICRO-FIDUCIAL]  26.04,83.69 0 bottom
FID129  FIDUCIALUFIDUCIAL  [MICRO-FIDUCIAL]  60.45,83.82 0 top
FID130  FIDUCIALUFIDUCIAL  [MICRO-FIDUCIAL]  44.15,68.6 0 top
FID131  FIDUCIALUFIDUCIAL  [MICRO-FIDUCIAL]  60.33,66.8 0 bottom
FID132  FIDUCIALUFIDUCIAL  [MICRO-FIDUCIAL]  44.32,83.69 0 bottom
FID133  FIDUCIALUFIDUCIAL  [MICRO-FIDUCIAL]  78.74,83.82 0 top
FID134  FIDUCIALUFIDUCIAL  [MICRO-FIDUCIAL]  62.44,68.6 0 top
FID135  FIDUCIALUFIDUCIAL  [MICRO-FIDUCIAL]  78.61,66.8 0 bottom
FID136  FIDUCIALUFIDUCIAL  [MICRO-FIDUCIAL]  62.61,83.69 0 bottom
FID137  FIDUCIALUFIDUCIAL  [MICRO-FIDUCIAL]  97.03,83.82 0 top
FID138  FIDUCIALUFIDUCIAL  [MICRO-FIDUCIAL]  80.73,68.6 0 top
FID139  FIDUCIALUFIDUCIAL  [MICRO-FIDUCIAL]  96.9,66.8 0 bottom
FID140  FIDUCIALUFIDUCIAL  [MICRO-FIDUCIAL]  80.9,83.69 0 bottom
FID141  FIDUCIALUFIDUCIAL  [MICRO-FIDUCIAL]  115.32,83.82 0 top
FID142  FIDUCIALUFIDUCIAL  [MICRO-FIDUCIAL]  99.02,68.6 0 top
FID143  FIDUCIALUFIDUCIAL  [MICRO-FIDUCIAL]  115.19,66.8 0 bottom
FID144  FIDUCIALUFIDUCIAL  [MICRO-FIDUCIAL]  99.19,83.69 0 bottom
FID145  FIDUCIALUFIDUCIAL  [MICRO-FIDUCIAL]  133.6,83.82 0 top
FID146  FIDUCIALUFIDUCIAL  [MICRO-FIDUCIAL]  117.3,68.6 0 top
FID147  FIDUCIALUFIDUCIAL  [MICRO-FIDUCIAL]  133.48,66.8 0 bottom
FID148  FIDUCIALUFIDUCIAL  [MICRO-FIDUCIAL]  117.47,83.69 0 bottom
FID149  FIDUCIALUFIDUCIAL  [MICRO-FIDUCIAL]  151.89,83.82 0 top
FID150  FIDUCIALUFIDUCIAL  [MICRO-FIDUCIAL]  135.59,68.6 0 top
FID151  FIDUCIALUFIDUCIAL  [MICRO-FIDUCIAL]  151.76,66.8 0 bottom
FID152  FIDUCIALUFIDUCIAL  [MICRO-FIDUCIAL]  135.76,83.69 0 bottom
FID153  FIDUCIALUFIDUCIAL  [MICRO-FIDUCIAL]  170.18,83.82 0 top
FID154  FIDUCIALUFIDUCIAL  [MICRO-FIDUCIAL]  153.88,68.6 0 top
FID155  FIDUCIALUFIDUCIAL  [MICRO-FIDUCIAL]  170.05,66.8 0 bottom
FID156  FIDUCIALUFIDUCIAL  [MICRO-FIDUCIAL]  154.05,83.69 0 bottom
FID157  FIDUCIALUFIDUCIAL  [MICRO-FIDUCIAL]  188.47,83.82 0 top
FID158  FIDUCIALUFIDUCIAL  [MICRO-FIDUCIAL]  172.17,68.6 0 top
FID159  FIDUCIALUFIDUCIAL  [MICRO-FIDUCIAL]  188.34,66.8 0 bottom
FID160  FIDUCIALUFIDUCIAL  [MICRO-FIDUCIAL]  172.34,83.69 0 bottom
FID161  FIDUCIALUFIDUCIAL  [MICRO-FIDUCIAL]  23.88,103.38 0 top
FID162  FIDUCIALUFIDUCIAL  [MICRO-FIDUCIAL]  7.58,88.16 0 top
FID163  FIDUCIALUFIDUCIAL  [MICRO-FIDUCIAL]  23.75,86.36 0 bottom
FID164  FIDUCIALUFIDUCIAL  [MICRO-FIDUCIAL]  7.75,103.25 0 bottom
FID165  FIDUCIALUFIDUCIAL  [MICRO-FIDUCIAL]  42.16,103.38 0 top
FID166  FIDUCIALUFIDUCIAL  [MICRO-FIDUCIAL]  25.86,88.16 0 top
FID167  FIDUCIALUFIDUCIAL  [MICRO-FIDUCIAL]  42.04,86.36 0 bottom
FID168  FIDUCIALUFIDUCIAL  [MICRO-FIDUCIAL]  26.04,103.25 0 bottom
FID169  FIDUCIALUFIDUCIAL  [MICRO-FIDUCIAL]  60.45,103.38 0 top
FID170  FIDUCIALUFIDUCIAL  [MICRO-FIDUCIAL]  44.15,88.16 0 top
FID171  FIDUCIALUFIDUCIAL  [MICRO-FIDUCIAL]  60.33,86.36 0 bottom
FID172  FIDUCIALUFIDUCIAL  [MICRO-FIDUCIAL]  44.32,103.25 0 bottom
FID173  FIDUCIALUFIDUCIAL  [MICRO-FIDUCIAL]  78.74,103.38 0 top
FID174  FIDUCIALUFIDUCIAL  [MICRO-FIDUCIAL]  62.44,88.16 0 top
FID175  FIDUCIALUFIDUCIAL  [MICRO-FIDUCIAL]  78.61,86.36 0 bottom
FID176  FIDUCIALUFIDUCIAL  [MICRO-FIDUCIAL]  62.61,103.25 0 bottom
FID177  FIDUCIALUFIDUCIAL  [MICRO-FIDUCIAL]  97.03,103.38 0 top
FID178  FIDUCIALUFIDUCIAL  [MICRO-FIDUCIAL]  80.73,88.16 0 top
FID179  FIDUCIALUFIDUCIAL  [MICRO-FIDUCIAL]  96.9,86.36 0 bottom
FID180  FIDUCIALUFIDUCIAL  [MICRO-FIDUCIAL]  80.9,103.25 0 bottom
FID181  FIDUCIALUFIDUCIAL  [MICRO-FIDUCIAL]  115.32,103.38 0 top
FID182  FIDUCIALUFIDUCIAL  [MICRO-FIDUCIAL]  99.02,88.16 0 top
FID183  FIDUCIALUFIDUCIAL  [MICRO-FIDUCIAL]  115.19,86.36 0 bottom
FID184  FIDUCIALUFIDUCIAL  [MICRO-FIDUCIAL]  99.19,103.25 0 bottom
FID185  FIDUCIALUFIDUCIAL  [MICRO-FIDUCIAL]  133.6,103.38 0 top
FID186  FIDUCIALUFIDUCIAL  [MICRO-FIDUCIAL]  117.3,88.16 0 top
FID187  FIDUCIALUFIDUCIAL  [MICRO-FIDUCIAL]  133.48,86.36 0 bottom
FID188  FIDUCIALUFIDUCIAL  [MICRO-FIDUCIAL]  117.47,103.25 0 bottom
FID189  FIDUCIALUFIDUCIAL  [MICRO-FIDUCIAL]  151.89,103.38 0 top
FID190  FIDUCIALUFIDUCIAL  [MICRO-FIDUCIAL]  135.59,88.16 0 top
FID191  FIDUCIALUFIDUCIAL  [MICRO-FIDUCIAL]  151.76,86.36 0 bottom
FID192  FIDUCIALUFIDUCIAL  [MICRO-FIDUCIAL]  135.76,103.25 0 bottom
FID193  FIDUCIALUFIDUCIAL  [MICRO-FIDUCIAL]  170.18,103.38 0 top
FID194  FIDUCIALUFIDUCIAL  [MICRO-FIDUCIAL]  153.88,88.16 0 top
FID195  FIDUCIALUFIDUCIAL  [MICRO-FIDUCIAL]  170.05,86.36 0 bottom
FID196  FIDUCIALUFIDUCIAL  [MICRO-FIDUCIAL]  154.05,103.25 0 bottom
FID197  FIDUCIALUFIDUCIAL  [MICRO-FIDUCIAL]  188.47,103.38 0 top
FID198  FIDUCIALUFIDUCIAL  [MICRO-FIDUCIAL]  172.17,88.16 0 top
FID199  FIDUCIALUFIDUCIAL  [MICRO-FIDUCIAL]  188.34,86.36 0 bottom
FID200  FIDUCIALUFIDUCIAL  [MICRO-FIDUCIAL]  172.34,103.25 0 bottom
FID201  FIDUCIALUFIDUCIAL  [MICRO-FIDUCIAL]  206.76,25.15 0 top
FID202  FIDUCIALUFIDUCIAL  [MICRO-FIDUCIAL]  190.46,9.93 0 top
FID203  FIDUCIALUFIDUCIAL  [MICRO-FIDUCIAL]  206.63,8.13 0 bottom
FID204  FIDUCIALUFIDUCIAL  [MICRO-FIDUCIAL]  190.63,25.02 0 bottom
FID205  FIDUCIALUFIDUCIAL  [MICRO-FIDUCIAL]  206.76,44.7 0 top
FID206  FIDUCIALUFIDUCIAL  [MICRO-FIDUCIAL]  190.46,29.49 0 top
FID207  FIDUCIALUFIDUCIAL  [MICRO-FIDUCIAL]  206.63,27.69 0 bottom
FID208  FIDUCIALUFIDUCIAL  [MICRO-FIDUCIAL]  190.63,44.58 0 bottom
FID209  FIDUCIALUFIDUCIAL  [MICRO-FIDUCIAL]  206.76,64.26 0 top
FID210  FIDUCIALUFIDUCIAL  [MICRO-FIDUCIAL]  190.46,49.04 0 top
FID211  FIDUCIALUFIDUCIAL  [MICRO-FIDUCIAL]  206.63,47.24 0 bottom
FID212  FIDUCIALUFIDUCIAL  [MICRO-FIDUCIAL]  190.63,64.14 0 bottom
FID213  FIDUCIALUFIDUCIAL  [MICRO-FIDUCIAL]  206.76,83.82 0 top
FID214  FIDUCIALUFIDUCIAL  [MICRO-FIDUCIAL]  190.46,68.6 0 top
FID215  FIDUCIALUFIDUCIAL  [MICRO-FIDUCIAL]  206.63,66.8 0 bottom
FID216  FIDUCIALUFIDUCIAL  [MICRO-FIDUCIAL]  190.63,83.69 0 bottom
FID217  FIDUCIALUFIDUCIAL  [MICRO-FIDUCIAL]  206.76,103.38 0 top
FID218  FIDUCIALUFIDUCIAL  [MICRO-FIDUCIAL]  190.46,88.16 0 top
FID219  FIDUCIALUFIDUCIAL  [MICRO-FIDUCIAL]  206.63,86.36 0 bottom
FID220  FIDUCIALUFIDUCIAL  [MICRO-FIDUCIAL]  190.63,103.25 0 bottom
FID221  FIDUCIALUFIDUCIAL  [MICRO-FIDUCIAL]  225.04,25.15 0 top
FID222  FIDUCIALUFIDUCIAL  [MICRO-FIDUCIAL]  208.74,9.93 0 top
FID223  FIDUCIALUFIDUCIAL  [MICRO-FIDUCIAL]  224.92,8.13 0 bottom
FID224  FIDUCIALUFIDUCIAL  [MICRO-FIDUCIAL]  208.91,25.02 0 bottom
FID225  FIDUCIALUFIDUCIAL  [MICRO-FIDUCIAL]  225.04,44.7 0 top
FID226  FIDUCIALUFIDUCIAL  [MICRO-FIDUCIAL]  208.74,29.49 0 top
FID227  FIDUCIALUFIDUCIAL  [MICRO-FIDUCIAL]  224.92,27.69 0 bottom
FID228  FIDUCIALUFIDUCIAL  [MICRO-FIDUCIAL]  208.91,44.58 0 bottom
FID229  FIDUCIALUFIDUCIAL  [MICRO-FIDUCIAL]  225.04,64.26 0 top
FID230  FIDUCIALUFIDUCIAL  [MICRO-FIDUCIAL]  208.74,49.04 0 top
FID231  FIDUCIALUFIDUCIAL  [MICRO-FIDUCIAL]  224.92,47.24 0 bottom
FID232  FIDUCIALUFIDUCIAL  [MICRO-FIDUCIAL]  208.91,64.14 0 bottom
FID233  FIDUCIALUFIDUCIAL  [MICRO-FIDUCIAL]  225.04,83.82 0 top
FID234  FIDUCIALUFIDUCIAL  [MICRO-FIDUCIAL]  208.74,68.6 0 top
FID235  FIDUCIALUFIDUCIAL  [MICRO-FIDUCIAL]  224.92,66.8 0 bottom
FID236  FIDUCIALUFIDUCIAL  [MICRO-FIDUCIAL]  208.91,83.69 0 bottom
FID237  FIDUCIALUFIDUCIAL  [MICRO-FIDUCIAL]  225.04,103.38 0 top
FID238  FIDUCIALUFIDUCIAL  [MICRO-FIDUCIAL]  208.74,88.16 0 top
FID239  FIDUCIALUFIDUCIAL  [MICRO-FIDUCIAL]  224.92,86.36 0 bottom
FID240  FIDUCIALUFIDUCIAL  [MICRO-FIDUCIAL]  208.91,103.25 0 bottom
JP1  Serial Connection  [1X06]  9.4,8.13 0 top
JP2  [1X04]  11.94,24.64 0 top
JP3  Serial Connection  [1X06]  27.69,8.13 0 top
JP4  [1X04]  30.23,24.64 0 top
JP5  Serial Connection  [1X06]  45.97,8.13 0 top
JP6  [1X04]  48.51,24.64 0 top
JP7  Serial Connection  [1X06]  64.26,8.13 0 top
JP8  [1X04]  66.8,24.64 0 top
JP9  Serial Connection  [1X06]  82.55,8.13 0 top
JP10  [1X04]  85.09,24.64 0 top
JP11  Serial Connection  [1X06]  100.84,8.13 0 top
JP12  [1X04]  103.38,24.64 0 top
JP13  Serial Connection  [1X06]  119.13,8.13 0 top
JP14  [1X04]  121.67,24.64 0 top
JP15  Serial Connection  [1X06]  137.41,8.13 0 top
JP16  [1X04]  139.95,24.64 0 top
JP17  Serial Connection  [1X06]  155.7,8.13 0 top
JP18  [1X04]  158.24,24.64 0 top
JP19  Serial Connection  [1X06]  173.99,8.13 0 top
JP20  [1X04]  176.53,24.64 0 top
JP21  Serial Connection  [1X06]  9.4,27.69 0 top
JP22  [1X04]  11.94,44.2 0 top
JP23  Serial Connection  [1X06]  27.69,27.69 0 top
JP24  [1X04]  30.23,44.2 0 top
JP25  Serial Connection  [1X06]  45.97,27.69 0 top
JP26  [1X04]  48.51,44.2 0 top
JP27  Serial Connection  [1X06]  64.26,27.69 0 top
JP28  [1X04]  66.8,44.2 0 top
JP29  Serial Connection  [1X06]  82.55,27.69 0 top
JP30  [1X04]  85.09,44.2 0 top
JP31  Serial Connection  [1X06]  100.84,27.69 0 top
JP32  [1X04]  103.38,44.2 0 top
JP33  Serial Connection  [1X06]  119.13,27.69 0 top
JP34  [1X04]  121.67,44.2 0 top
JP35  Serial Connection  [1X06]  137.41,27.69 0 top
JP36  [1X04]  139.95,44.2 0 top
JP37  Serial Connection  [1X06]  155.7,27.69 0 top
JP38  [1X04]  158.24,44.2 0 top
JP39  Serial Connection  [1X06]  173.99,27.69 0 top
JP40  [1X04]  176.53,44.2 0 top
JP41  Serial Connection  [1X06]  9.4,47.24 0 top
JP42  [1X04]  11.94,63.75 0 top
JP43  Serial Connection  [1X06]  27.69,47.24 0 top
JP44  [1X04]  30.23,63.75 0 top
JP45  Serial Connection  [1X06]  45.97,47.24 0 top
JP46  [1X04]  48.51,63.75 0 top
JP47  Serial Connection  [1X06]  64.26,47.24 0 top
JP48  [1X04]  66.8,63.75 0 top
JP49  Serial Connection  [1X06]  82.55,47.24 0 top
JP50  [1X04]  85.09,63.75 0 top
JP51  Serial Connection  [1X06]  100.84,47.24 0 top
JP52  [1X04]  103.38,63.75 0 top
JP53  Serial Connection  [1X06]  119.13,47.24 0 top
JP54  [1X04]  121.67,63.75 0 top
JP55  Serial Connection  [1X06]  137.41,47.24 0 top
JP56  [1X04]  139.95,63.75 0 top
JP57  Serial Connection  [1X06]  155.7,47.24 0 top
JP58  [1X04]  158.24,63.75 0 top
JP59  Serial Connection  [1X06]  173.99,47.24 0 top
JP60  [1X04]  176.53,63.75 0 top
JP61  Serial Connection  [1X06]  9.4,66.8 0 top
JP62  [1X04]  11.94,83.31 0 top
JP63  Serial Connection  [1X06]  27.69,66.8 0 top
JP64  [1X04]  30.23,83.31 0 top
JP65  Serial Connection  [1X06]  45.97,66.8 0 top
JP66  [1X04]  48.51,83.31 0 top
JP67  Serial Connection  [1X06]  64.26,66.8 0 top
JP68  [1X04]  66.8,83.31 0 top
JP69  Serial Connection  [1X06]  82.55,66.8 0 top
JP70  [1X04]  85.09,83.31 0 top
JP71  Serial Connection  [1X06]  100.84,66.8 0 top
JP72  [1X04]  103.38,83.31 0 top
JP73  Serial Connection  [1X06]  119.13,66.8 0 top
JP74  [1X04]  121.67,83.31 0 top
JP75  Serial Connection  [1X06]  137.41,66.8 0 top
JP76  [1X04]  139.95,83.31 0 top
JP77  Serial Connection  [1X06]  155.7,66.8 0 top
JP78  [1X04]  158.24,83.31 0 top
JP79  Serial Connection  [1X06]  173.99,66.8 0 top
JP80  [1X04]  176.53,83.31 0 top
JP81  Serial Connection  [1X06]  9.4,86.36 0 top
JP82  [1X04]  11.94,102.87 0 top
JP83  Serial Connection  [1X06]  27.69,86.36 0 top
JP84  [1X04]  30.23,102.87 0 top
JP85  Serial Connection  [1X06]  45.97,86.36 0 top
JP86  [1X04]  48.51,102.87 0 top
JP87  Serial Connection  [1X06]  64.26,86.36 0 top
JP88  [1X04]  66.8,102.87 0 top
JP89  Serial Connection  [1X06]  82.55,86.36 0 top
JP90  [1X04]  85.09,102.87 0 top
JP91  Serial Connection  [1X06]  100.84,86.36 0 top
JP92  [1X04]  103.38,102.87 0 top
JP93  Serial Connection  [1X06]  119.13,86.36 0 top
JP94  [1X04]  121.67,102.87 0 top
JP95  Serial Connection  [1X06]  137.41,86.36 0 top
JP96  [1X04]  139.95,102.87 0 top
JP97  Serial Connection  [1X06]  155.7,86.36 0 top
JP98  [1X04]  158.24,102.87 0 top
JP99  Serial Connection  [1X06]  173.99,86.36 0 top
JP100  [1X04]  176.53,102.87 0 top
JP101  Serial Connection  [1X06]  192.28,8.13 0 top
JP102  [1X04]  194.82,24.64 0 top
JP103  Serial Connection  [1X06]  192.28,27.69 0 top
JP104  [1X04]  194.82,44.2 0 top
JP105  Serial Connection  [1X06]  192.28,47.24 0 top
JP106  [1X04]  194.82,63.75 0 top
JP107  Serial Connection  [1X06]  192.28,66.8 0 top
JP108  [1X04]  194.82,83.31 0 top
JP109  Serial Connection  [1X06]  192.28,86.36 0 top
JP110  [1X04]  194.82,102.87 0 top
JP111  Serial Connection  [1X06]  210.57,8.13 0 top
JP112  [1X04]  213.11,24.64 0 top
JP113  Serial Connection  [1X06]  210.57,27.69 0 top
JP114  [1X04]  213.11,44.2 0 top
JP115  Serial Connection  [1X06]  210.57,47.24 0 top
JP116  [1X04]  213.11,63.75 0 top
JP117  Serial Connection  [1X06]  210.57,66.8 0 top
JP118  [1X04]  213.11,83.31 0 top
JP119  Serial Connection  [1X06]  210.57,86.36 0 top
JP120  [1X04]  213.11,102.87 0 top
LOGO1  SFE_LOGO_FLAME.1_INCH  [SFE_LOGO_FLAME_.1]  8.63,11.24 0 top
LOGO2  OSHW-LOGOS  [OSHW-LOGO-S]  8.76,24.13 0 top
LOGO3  SFE_LOGO_FLAME.1_INCH  [SFE_LOGO_FLAME_.1]  26.92,11.24 0 top
LOGO4  OSHW-LOGOS  [OSHW-LOGO-S]  27.05,24.13 0 top
LOGO5  SFE_LOGO_FLAME.1_INCH  [SFE_LOGO_FLAME_.1]  45.21,11.24 0 top
LOGO6  OSHW-LOGOS  [OSHW-LOGO-S]  45.34,24.13 0 top
LOGO7  SFE_LOGO_FLAME.1_INCH  [SFE_LOGO_FLAME_.1]  63.49,11.24 0 top
LOGO8  OSHW-LOGOS  [OSHW-LOGO-S]  63.63,24.13 0 top
LOGO9  SFE_LOGO_FLAME.1_INCH  [SFE_LOGO_FLAME_.1]  81.78,11.24 0 top
LOGO10  OSHW-LOGOS  [OSHW-LOGO-S]  81.92,24.13 0 top
LOGO11  SFE_LOGO_FLAME.1_INCH  [SFE_LOGO_FLAME_.1]  100.07,11.24 0 top
LOGO12  OSHW-LOGOS  [OSHW-LOGO-S]  100.2,24.13 0 top
LOGO13  SFE_LOGO_FLAME.1_INCH  [SFE_LOGO_FLAME_.1]  118.36,11.24 0 top
LOGO14  OSHW-LOGOS  [OSHW-LOGO-S]  118.49,24.13 0 top
LOGO15  SFE_LOGO_FLAME.1_INCH  [SFE_LOGO_FLAME_.1]  136.65,11.24 0 top
LOGO16  OSHW-LOGOS  [OSHW-LOGO-S]  136.78,24.13 0 top
LOGO17  SFE_LOGO_FLAME.1_INCH  [SFE_LOGO_FLAME_.1]  154.93,11.24 0 top
LOGO18  OSHW-LOGOS  [OSHW-LOGO-S]  155.07,24.13 0 top
LOGO19  SFE_LOGO_FLAME.1_INCH  [SFE_LOGO_FLAME_.1]  173.22,11.24 0 top
LOGO20  OSHW-LOGOS  [OSHW-LOGO-S]  173.35,24.13 0 top
LOGO21  SFE_LOGO_FLAME.1_INCH  [SFE_LOGO_FLAME_.1]  8.63,30.8 0 top
LOGO22  OSHW-LOGOS  [OSHW-LOGO-S]  8.76,43.69 0 top
LOGO23  SFE_LOGO_FLAME.1_INCH  [SFE_LOGO_FLAME_.1]  26.92,30.8 0 top
LOGO24  OSHW-LOGOS  [OSHW-LOGO-S]  27.05,43.69 0 top
LOGO25  SFE_LOGO_FLAME.1_INCH  [SFE_LOGO_FLAME_.1]  45.21,30.8 0 top
LOGO26  OSHW-LOGOS  [OSHW-LOGO-S]  45.34,43.69 0 top
LOGO27  SFE_LOGO_FLAME.1_INCH  [SFE_LOGO_FLAME_.1]  63.49,30.8 0 top
LOGO28  OSHW-LOGOS  [OSHW-LOGO-S]  63.63,43.69 0 top
LOGO29  SFE_LOGO_FLAME.1_INCH  [SFE_LOGO_FLAME_.1]  81.78,30.8 0 top
LOGO30  OSHW-LOGOS  [OSHW-LOGO-S]  81.92,43.69 0 top
LOGO31  SFE_LOGO_FLAME.1_INCH  [SFE_LOGO_FLAME_.1]  100.07,30.8 0 top
LOGO32  OSHW-LOGOS  [OSHW-LOGO-S]  100.2,43.69 0 top
LOGO33  SFE_LOGO_FLAME.1_INCH  [SFE_LOGO_FLAME_.1]  118.36,30.8 0 top
LOGO34  OSHW-LOGOS  [OSHW-LOGO-S]  118.49,43.69 0 top
LOGO35  SFE_LOGO_FLAME.1_INCH  [SFE_LOGO_FLAME_.1]  136.65,30.8 0 top
LOGO36  OSHW-LOGOS  [OSHW-LOGO-S]  136.78,43.69 0 top
LOGO37  SFE_LOGO_FLAME.1_INCH  [SFE_LOGO_FLAME_.1]  154.93,30.8 0 top
LOGO38  OSHW-LOGOS  [OSHW-LOGO-S]  155.07,43.69 0 top
LOGO39  SFE_LOGO_FLAME.1_INCH  [SFE_LOGO_FLAME_.1]  173.22,30.8 0 top
LOGO40  OSHW-LOGOS  [OSHW-LOGO-S]  173.35,43.69 0 top
LOGO41  SFE_LOGO_FLAME.1_INCH  [SFE_LOGO_FLAME_.1]  8.63,50.36 0 top
LOGO42  OSHW-LOGOS  [OSHW-LOGO-S]  8.76,63.25 0 top
LOGO43  SFE_LOGO_FLAME.1_INCH  [SFE_LOGO_FLAME_.1]  26.92,50.36 0 top
LOGO44  OSHW-LOGOS  [OSHW-LOGO-S]  27.05,63.25 0 top
LOGO45  SFE_LOGO_FLAME.1_INCH  [SFE_LOGO_FLAME_.1]  45.21,50.36 0 top
LOGO46  OSHW-LOGOS  [OSHW-LOGO-S]  45.34,63.25 0 top
LOGO47  SFE_LOGO_FLAME.1_INCH  [SFE_LOGO_FLAME_.1]  63.49,50.36 0 top
LOGO48  OSHW-LOGOS  [OSHW-LOGO-S]  63.63,63.25 0 top
LOGO49  SFE_LOGO_FLAME.1_INCH  [SFE_LOGO_FLAME_.1]  81.78,50.36 0 top
LOGO50  OSHW-LOGOS  [OSHW-LOGO-S]  81.92,63.25 0 top
LOGO51  SFE_LOGO_FLAME.1_INCH  [SFE_LOGO_FLAME_.1]  100.07,50.36 0 top
LOGO52  OSHW-LOGOS  [OSHW-LOGO-S]  100.2,63.25 0 top
LOGO53  SFE_LOGO_FLAME.1_INCH  [SFE_LOGO_FLAME_.1]  118.36,50.36 0 top
LOGO54  OSHW-LOGOS  [OSHW-LOGO-S]  118.49,63.25 0 top
LOGO55  SFE_LOGO_FLAME.1_INCH  [SFE_LOGO_FLAME_.1]  136.65,50.36 0 top
LOGO56  OSHW-LOGOS  [OSHW-LOGO-S]  136.78,63.25 0 top
LOGO57  SFE_LOGO_FLAME.1_INCH  [SFE_LOGO_FLAME_.1]  154.93,50.36 0 top
LOGO58  OSHW-LOGOS  [OSHW-LOGO-S]  155.07,63.25 0 top
LOGO59  SFE_LOGO_FLAME.1_INCH  [SFE_LOGO_FLAME_.1]  173.22,50.36 0 top
LOGO60  OSHW-LOGOS  [OSHW-LOGO-S]  173.35,63.25 0 top
LOGO61  SFE_LOGO_FLAME.1_INCH  [SFE_LOGO_FLAME_.1]  8.63,69.92 0 top
LOGO62  OSHW-LOGOS  [OSHW-LOGO-S]  8.76,82.8 0 top
LOGO63  SFE_LOGO_FLAME.1_INCH  [SFE_LOGO_FLAME_.1]  26.92,69.92 0 top
LOGO64  OSHW-LOGOS  [OSHW-LOGO-S]  27.05,82.8 0 top
LOGO65  SFE_LOGO_FLAME.1_INCH  [SFE_LOGO_FLAME_.1]  45.21,69.92 0 top
LOGO66  OSHW-LOGOS  [OSHW-LOGO-S]  45.34,82.8 0 top
LOGO67  SFE_LOGO_FLAME.1_INCH  [SFE_LOGO_FLAME_.1]  63.49,69.92 0 top
LOGO68  OSHW-LOGOS  [OSHW-LOGO-S]  63.63,82.8 0 top
LOGO69  SFE_LOGO_FLAME.1_INCH  [SFE_LOGO_FLAME_.1]  81.78,69.92 0 top
LOGO70  OSHW-LOGOS  [OSHW-LOGO-S]  81.92,82.8 0 top
LOGO71  SFE_LOGO_FLAME.1_INCH  [SFE_LOGO_FLAME_.1]  100.07,69.92 0 top
LOGO72  OSHW-LOGOS  [OSHW-LOGO-S]  100.2,82.8 0 top
LOGO73  SFE_LOGO_FLAME.1_INCH  [SFE_LOGO_FLAME_.1]  118.36,69.92 0 top
LOGO74  OSHW-LOGOS  [OSHW-LOGO-S]  118.49,82.8 0 top
LOGO75  SFE_LOGO_FLAME.1_INCH  [SFE_LOGO_FLAME_.1]  136.65,69.92 0 top
LOGO76  OSHW-LOGOS  [OSHW-LOGO-S]  136.78,82.8 0 top
LOGO77  SFE_LOGO_FLAME.1_INCH  [SFE_LOGO_FLAME_.1]  154.93,69.92 0 top
LOGO78  OSHW-LOGOS  [OSHW-LOGO-S]  155.07,82.8 0 top
LOGO79  SFE_LOGO_FLAME.1_INCH  [SFE_LOGO_FLAME_.1]  173.22,69.92 0 top
LOGO80  OSHW-LOGOS  [OSHW-LOGO-S]  173.35,82.8 0 top
LOGO81  SFE_LOGO_FLAME.1_INCH  [SFE_LOGO_FLAME_.1]  8.63,89.47 0 top
LOGO82  OSHW-LOGOS  [OSHW-LOGO-S]  8.76,102.36 0 top
LOGO83  SFE_LOGO_FLAME.1_INCH  [SFE_LOGO_FLAME_.1]  26.92,89.47 0 top
LOGO84  OSHW-LOGOS  [OSHW-LOGO-S]  27.05,102.36 0 top
LOGO85  SFE_LOGO_FLAME.1_INCH  [SFE_LOGO_FLAME_.1]  45.21,89.47 0 top
LOGO86  OSHW-LOGOS  [OSHW-LOGO-S]  45.34,102.36 0 top
LOGO87  SFE_LOGO_FLAME.1_INCH  [SFE_LOGO_FLAME_.1]  63.49,89.47 0 top
LOGO88  OSHW-LOGOS  [OSHW-LOGO-S]  63.63,102.36 0 top
LOGO89  SFE_LOGO_FLAME.1_INCH  [SFE_LOGO_FLAME_.1]  81.78,89.47 0 top
LOGO90  OSHW-LOGOS  [OSHW-LOGO-S]  81.92,102.36 0 top
LOGO91  SFE_LOGO_FLAME.1_INCH  [SFE_LOGO_FLAME_.1]  100.07,89.47 0 top
LOGO92  OSHW-LOGOS  [OSHW-LOGO-S]  100.2,102.36 0 top
LOGO93  SFE_LOGO_FLAME.1_INCH  [SFE_LOGO_FLAME_.1]  118.36,89.47 0 top
LOGO94  OSHW-LOGOS  [OSHW-LOGO-S]  118.49,102.36 0 top
LOGO95  SFE_LOGO_FLAME.1_INCH  [SFE_LOGO_FLAME_.1]  136.65,89.47 0 top
LOGO96  OSHW-LOGOS  [OSHW-LOGO-S]  136.78,102.36 0 top
LOGO97  SFE_LOGO_FLAME.1_INCH  [SFE_LOGO_FLAME_.1]  154.93,89.47 0 top
LOGO98  OSHW-LOGOS  [OSHW-LOGO-S]  155.07,102.36 0 top
LOGO99  SFE_LOGO_FLAME.1_INCH  [SFE_LOGO_FLAME_.1]  173.22,89.47 0 top
LOGO100  OSHW-LOGOS  [OSHW-LOGO-S]  173.35,102.36 0 top
LOGO101  SFE_LOGO_FLAME.1_INCH  [SFE_LOGO_FLAME_.1]  191.51,11.24 0 top
LOGO102  OSHW-LOGOS  [OSHW-LOGO-S]  191.64,24.13 0 top
LOGO103  SFE_LOGO_FLAME.1_INCH  [SFE_LOGO_FLAME_.1]  191.51,30.8 0 top
LOGO104  OSHW-LOGOS  [OSHW-LOGO-S]  191.64,43.69 0 top
LOGO105  SFE_LOGO_FLAME.1_INCH  [SFE_LOGO_FLAME_.1]  191.51,50.36 0 top
LOGO106  OSHW-LOGOS  [OSHW-LOGO-S]  191.64,63.25 0 top
LOGO107  SFE_LOGO_FLAME.1_INCH  [SFE_LOGO_FLAME_.1]  191.51,69.92 0 top
LOGO108  OSHW-LOGOS  [OSHW-LOGO-S]  191.64,82.8 0 top
LOGO109  SFE_LOGO_FLAME.1_INCH  [SFE_LOGO_FLAME_.1]  191.51,89.47 0 top
LOGO110  OSHW-LOGOS  [OSHW-LOGO-S]  191.64,102.36 0 top
LOGO111  SFE_LOGO_FLAME.1_INCH  [SFE_LOGO_FLAME_.1]  209.8,11.24 0 top
LOGO112  OSHW-LOGOS  [OSHW-LOGO-S]  209.93,24.13 0 top
LOGO113  SFE_LOGO_FLAME.1_INCH  [SFE_LOGO_FLAME_.1]  209.8,30.8 0 top
LOGO114  OSHW-LOGOS  [OSHW-LOGO-S]  209.93,43.69 0 top
LOGO115  SFE_LOGO_FLAME.1_INCH  [SFE_LOGO_FLAME_.1]  209.8,50.36 0 top
LOGO116  OSHW-LOGOS  [OSHW-LOGO-S]  209.93,63.25 0 top
LOGO117  SFE_LOGO_FLAME.1_INCH  [SFE_LOGO_FLAME_.1]  209.8,69.92 0 top
LOGO118  OSHW-LOGOS  [OSHW-LOGO-S]  209.93,82.8 0 top
LOGO119  SFE_LOGO_FLAME.1_INCH  [SFE_LOGO_FLAME_.1]  209.8,89.47 0 top
LOGO120  OSHW-LOGOS  [OSHW-LOGO-S]  209.93,102.36 0 top
Q1  16MHZ  [RESONATOR-SMD]  23.13,18.5 270 top
Q2  16MHZ  [RESONATOR-SMD]  41.42,18.5 270 top
Q3  16MHZ  [RESONATOR-SMD]  59.71,18.5 270 top
Q4  16MHZ  [RESONATOR-SMD]  77.99,18.5 270 top
Q5  16MHZ  [RESONATOR-SMD]  96.28,18.5 270 top
Q6  16MHZ  [RESONATOR-SMD]  114.57,18.5 270 top
Q7  16MHZ  [RESONATOR-SMD]  132.86,18.5 270 top
Q8  16MHZ  [RESONATOR-SMD]  151.15,18.5 270 top
Q9  16MHZ  [RESONATOR-SMD]  169.43,18.5 270 top
Q10  16MHZ  [RESONATOR-SMD]  187.72,18.5 270 top
Q11  16MHZ  [RESONATOR-SMD]  23.13,38.06 270 top
Q12  16MHZ  [RESONATOR-SMD]  41.42,38.06 270 top
Q13  16MHZ  [RESONATOR-SMD]  59.71,38.06 270 top
Q14  16MHZ  [RESONATOR-SMD]  77.99,38.06 270 top
Q15  16MHZ  [RESONATOR-SMD]  96.28,38.06 270 top
Q16  16MHZ  [RESONATOR-SMD]  114.57,38.06 270 top
Q17  16MHZ  [RESONATOR-SMD]  132.86,38.06 270 top
Q18  16MHZ  [RESONATOR-SMD]  151.15,38.06 270 top
Q19  16MHZ  [RESONATOR-SMD]  169.43,38.06 270 top
Q20  16MHZ  [RESONATOR-SMD]  187.72,38.06 270 top
Q21  16MHZ  [RESONATOR-SMD]  23.13,57.61 270 top
Q22  16MHZ  [RESONATOR-SMD]  41.42,57.61 270 top
Q23  16MHZ  [RESONATOR-SMD]  59.71,57.61 270 top
Q24  16MHZ  [RESONATOR-SMD]  77.99,57.61 270 top
Q25  16MHZ  [RESONATOR-SMD]  96.28,57.61 270 top
Q26  16MHZ  [RESONATOR-SMD]  114.57,57.61 270 top
Q27  16MHZ  [RESONATOR-SMD]  132.86,57.61 270 top
Q28  16MHZ  [RESONATOR-SMD]  151.15,57.61 270 top
Q29  16MHZ  [RESONATOR-SMD]  169.43,57.61 270 top
Q30  16MHZ  [RESONATOR-SMD]  187.72,57.61 270 top
Q31  16MHZ  [RESONATOR-SMD]  23.13,77.17 270 top
Q32  16MHZ  [RESONATOR-SMD]  41.42,77.17 270 top
Q33  16MHZ  [RESONATOR-SMD]  59.71,77.17 270 top
Q34  16MHZ  [RESONATOR-SMD]  77.99,77.17 270 top
Q35  16MHZ  [RESONATOR-SMD]  96.28,77.17 270 top
Q36  16MHZ  [RESONATOR-SMD]  114.57,77.17 270 top
Q37  16MHZ  [RESONATOR-SMD]  132.86,77.17 270 top
Q38  16MHZ  [RESONATOR-SMD]  151.15,77.17 270 top
Q39  16MHZ  [RESONATOR-SMD]  169.43,77.17 270 top
Q40  16MHZ  [RESONATOR-SMD]  187.72,77.17 270 top
Q41  16MHZ  [RESONATOR-SMD]  23.13,96.73 270 top
Q42  16MHZ  [RESONATOR-SMD]  41.42,96.73 270 top
Q43  16MHZ  [RESONATOR-SMD]  59.71,96.73 270 top
Q44  16MHZ  [RESONATOR-SMD]  77.99,96.73 270 top
Q45  16MHZ  [RESONATOR-SMD]  96.28,96.73 270 top
Q46  16MHZ  [RESONATOR-SMD]  114.57,96.73 270 top
Q47  16MHZ  [RESONATOR-SMD]  132.86,96.73 270 top
Q48  16MHZ  [RESONATOR-SMD]  151.15,96.73 270 top
Q49  16MHZ  [RESONATOR-SMD]  169.43,96.73 270 top
Q50  16MHZ  [RESONATOR-SMD]  187.72,96.73 270 top
Q51  16MHZ  [RESONATOR-SMD]  206.01,18.5 270 top
Q52  16MHZ  [RESONATOR-SMD]  206.01,38.06 270 top
Q53  16MHZ  [RESONATOR-SMD]  206.01,57.61 270 top
Q54  16MHZ  [RESONATOR-SMD]  206.01,77.17 270 top
Q55  16MHZ  [RESONATOR-SMD]  206.01,96.73 270 top
Q56  16MHZ  [RESONATOR-SMD]  224.3,18.5 270 top
Q57  16MHZ  [RESONATOR-SMD]  224.3,38.06 270 top
Q58  16MHZ  [RESONATOR-SMD]  224.3,57.61 270 top
Q59  16MHZ  [RESONATOR-SMD]  224.3,77.17 270 top
Q60  16MHZ  [RESONATOR-SMD]  224.3,96.73 270 top
R1  1K  [0603-RES]  22.76,21.19 0 top
R2  10K  [0603-RES]  9.05,15.5 0 top
R3  10K  [0603-RES]  27.34,15.5 0 top
R4  1K  [0603-RES]  27.45,20.77 180 top
R5  1K  [0603-RES]  41.04,21.19 0 top
R6  1K  [0603-RES]  9.16,20.77 180 top
R7  10K  [0603-RES]  45.62,15.5 0 top
R8  1K  [0603-RES]  45.74,20.77 180 top
R9  1K  [0603-RES]  59.33,21.19 0 top
R10  10K  [0603-RES]  63.91,15.5 0 top